# EAGLE board ethernet-expansion (EAGLE 7.2.0)
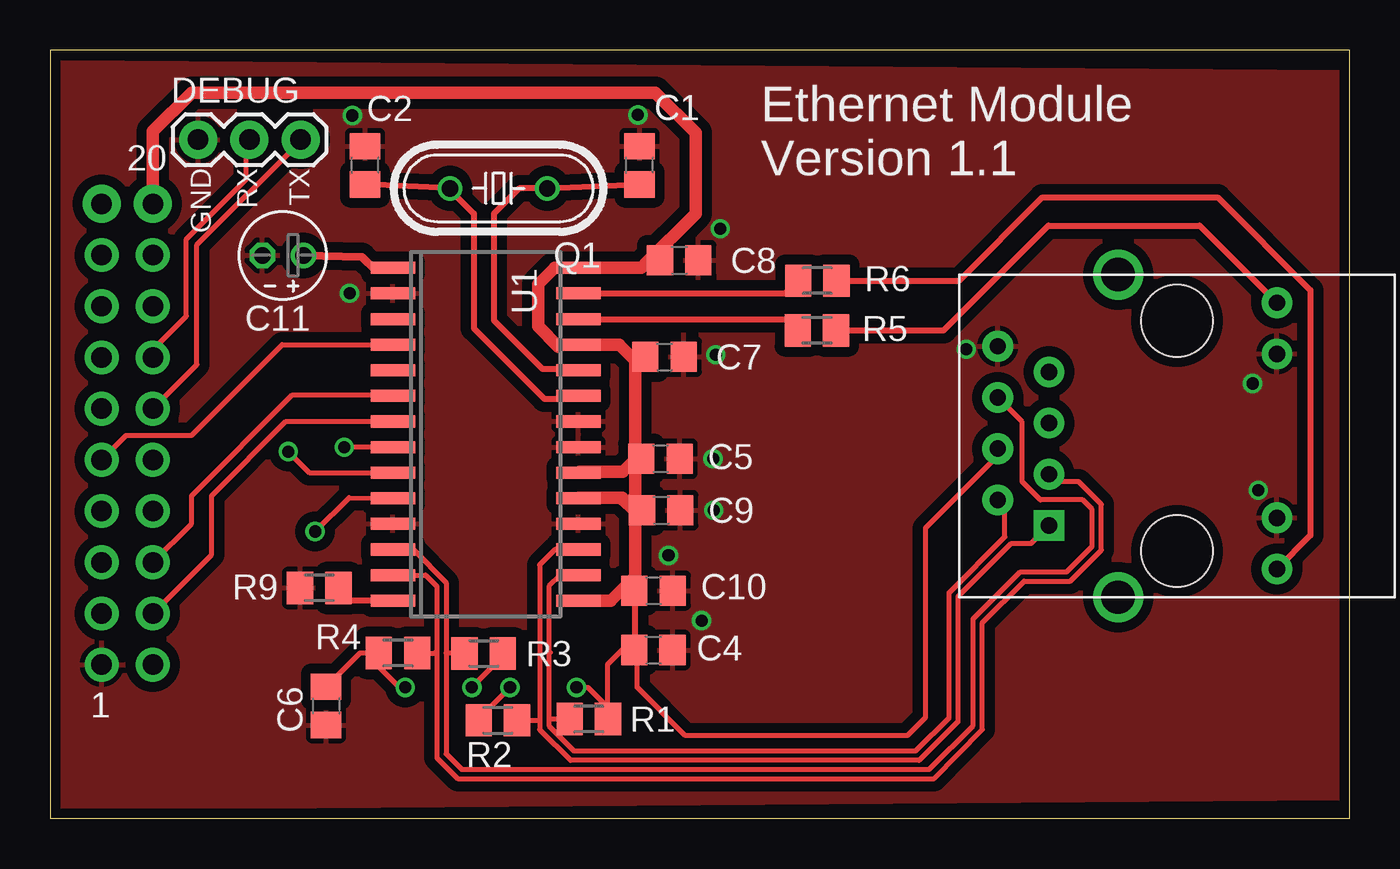
[diagram p0: board, top side]
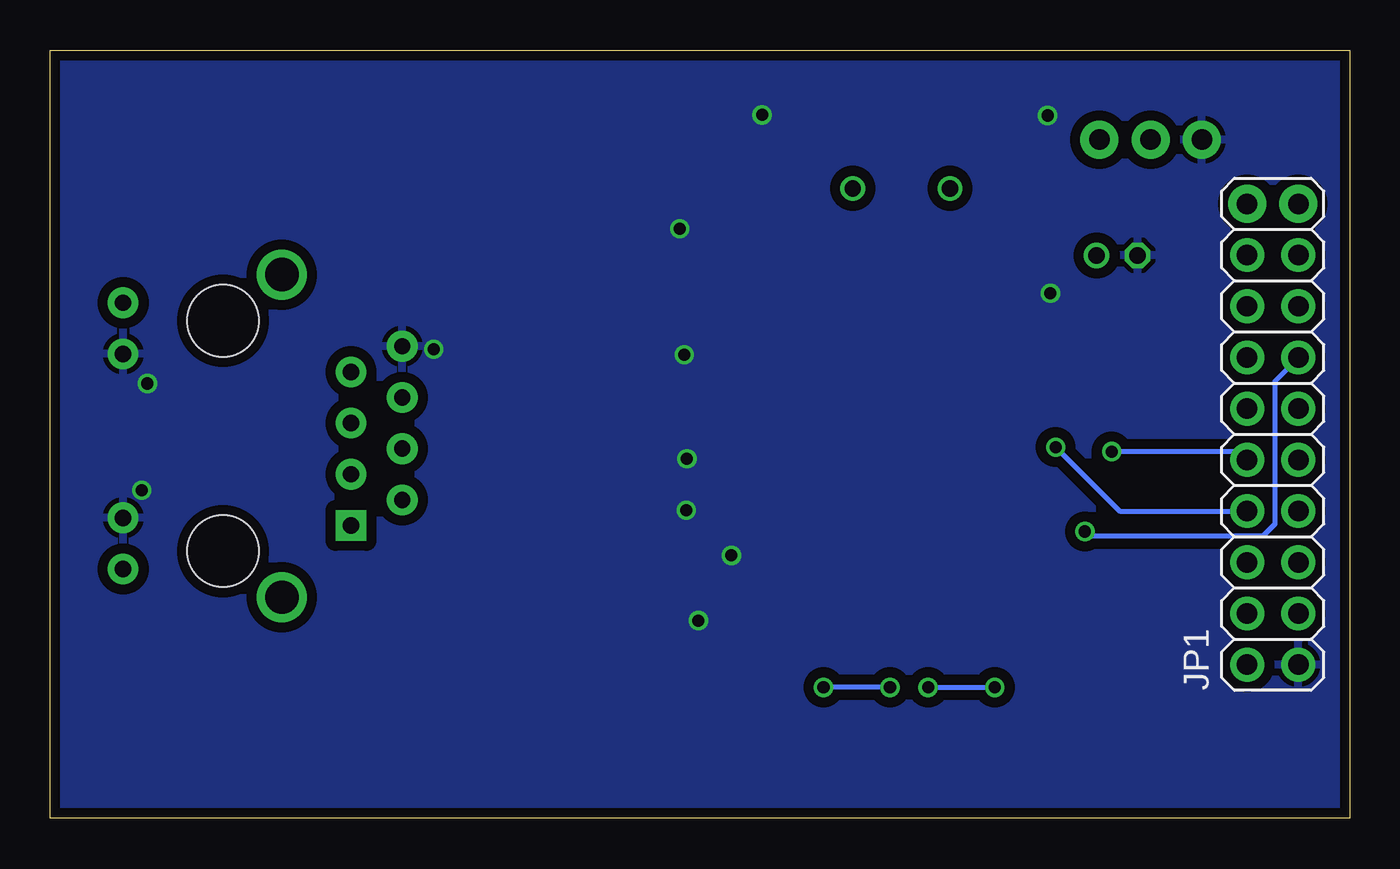
[diagram p1: board, bottom side, seen from below]

Size 64.44 x 38.09 mm. Coordinates in mm from the lower left corner, seen from the top.
Outline: 0,0 64.44,0 64.44,38.09 0,38.09 0,0
Copper layers (1*16): Top 0.0356mm / dielectric 1.5011mm / Bottom 0.0356mm
Design rules "LaenPCBOrder": minimum track width 6mil, minimum drill 13mil, track to track 6mil, track to pad 6mil, pad to pad 6mil, via to via 6mil, smd to smd 6mil, copper to edge 15mil, drill to drill 6mil, minimum pad ring 7mil, minimum via ring 7mil, stop-mask expansion 3mil, vias tented up to drill 0mil, thermal gap 10mil

## Footprints (pad centres in the part's own frame; a part is rotated, then mirrored left to right if it is on the bottom)
C0805 = smd 1.3 x 1.5: 1 -0.95,0; 2 0.95,0
E2-4 = drill 0.813 pad 1.27: + -1.016,0 | drill 0.813 pad 1.27 octagon: - 1.016,0
1X03 = drill 1.016 pad 1.88: 1 0,0; 2 2.54,0; 3 5.08,0
2X10 = drill 1.016 pad 1.676: 1 -11.43,-1.27; 2 -11.43,1.27; 3 -8.89,-1.27; 4 -8.89,1.27; 5 -6.35,-1.27; 6 -6.35,1.27; 7 -3.81,-1.27; 8 -3.81,1.27; 9 -1.27,-1.27; 10 -1.27,1.27; 11 1.27,-1.27; 12 1.27,1.27; 13 3.81,-1.27; 14 3.81,1.27; 15 6.35,-1.27; 16 6.35,1.27; 17 8.89,-1.27; 18 8.89,1.27 | drill 1.016 pad 1.88: 19 11.43,-1.27; 20 11.43,1.27
HC49/S = drill 0.813: 1 -2.413,0; 2 2.413,0
M0805 = smd 1.3 x 1.6: 1 -0.95,0; 2 0.95,0
HR911105A = drill 0.813 pad 1.524: G+ 4.953,-6.604; G- 4.953,-4.064; GND -8.89,4.445; NC -6.35,3.175; P4 -8.89,-0.635; P5 -6.35,0.635; RD+ -6.35,-1.905; RD- -8.89,1.905; TD- -8.89,-3.175; Y+ 4.953,6.604; Y- 4.953,4.064 | drill 1.651 pad 2.159: SHIELD0 -2.921,8.001; SHIELD1 -2.921,-8.001 | drill 0.813 pad 1.524 square: TD+ -6.35,-4.445 | hole 3.556: 0,-5.715; 0,5.715
SO28W = smd 0.6 x 2.2: 1 -8.255,-4.6; 2 -6.985,-4.6; 3 -5.715,-4.6; 4 -4.445,-4.6; 5 -3.175,-4.6; 6 -1.905,-4.6; 7 -0.635,-4.6; 8 0.635,-4.6; 9 1.905,-4.6; 10 3.175,-4.6; 11 4.445,-4.6; 12 5.715,-4.6; 13 6.985,-4.6; 14 8.255,-4.6; 15 8.255,4.6; 16 6.985,4.6; 17 5.715,4.6; 18 4.445,4.6; 19 3.175,4.6; 20 1.905,4.6; 21 0.635,4.6; 22 -0.635,4.6; 23 -1.905,4.6; 24 -3.175,4.6; 25 -4.445,4.6; 26 -5.715,4.6; 27 -6.985,4.6; 28 -8.255,4.6

## Placement (x,y rotation side)
C1  10pF  [C0805]  29.22,32.39 90 top
C2  10pF  [C0805]  15.61,32.39 90 top
C4  0.1uF  [C0805]  29.91,8.35 0 top
C5  0.1uF  [C0805]  30.26,17.84 0 top
C6  0.1uF  [C0805]  13.68,5.58 270 top
C7  0.1uF  [C0805]  30.46,22.89 0 top
C8  0.1uF  [C0805]  31.18,27.68 0 top
C9  0.1uF  [C0805]  30.29,15.28 0 top
C10  0.1uF  [C0805]  29.91,11.29 0 top
C11  10uF  [E2-4]  11.53,27.92 180 top
DEBUG  [1X03]  7.33,33.66 0 top
JP1  [2X10]  3.81,19.05 90 bottom
Q1  25MHz  [HC49/S]  22.23,31.25 180 top
R1  49.9  [M0805]  26.7,4.92 0 top
R2  49.9  [M0805]  22.2,4.87 180 top
R3  49.9  [M0805]  21.49,8.18 180 top
R4  49.9  [M0805]  17.24,8.2 0 top
R5  330  [M0805]  38.02,24.2 0 top
R6  330  [M0805]  38.04,26.67 0 top
R9  2.32K  [M0805]  13.34,11.43 0 top
RJ1  HR911105A  [HR911105A]  55.88,18.97 0 top
U1  ENC28J60-SO  [SO28W]  21.59,19.05 270 top

## Library data of the parts
C1 C2 C4-C11 R1-R6 R9 = resistor
DEBUG JP1 = SparkFun-Connectors
Q1 = crystal; OC_FARNELL: 1667008; OC_NEWARK: unknown
RJ1 = CONNECTER
U1 = microchip-enc28j60

## Nets
+3V3: C4.1 C5.1 C7.1 C8.1 C9.1 C10.1 JP1.20 R1.2 R2.2 RJ1.P4 U1.15 U1.19 U1.20 U1.25 U1.28
ETH_CLK: JP1.8 U1.8
ETH_CS: JP1.10 U1.9
ETH_INT: JP1.9 U1.4
ETH_MISO: JP1.6 U1.6
ETH_MOSI: JP1.4 U1.7
ETH_RESET: JP1.13 U1.10
GND: C1.2 C2.2 C4.2 C5.2 C6.2 C7.2 C8.2 C9.2 C10.2 C11.- DEBUG.1 JP1.1 R9.1 RJ1.G- RJ1.GND RJ1.Y- U1.2 U1.11 U1.18 U1.21 U1.22
GREEN: R6.1 U1.27
N$8: C6.1 R3.1 R4.1
N$9: R5.2 RJ1.Y+
N$10: R6.2 RJ1.G+
N$11: C1.1 Q1.1 U1.24
N$12: C2.1 Q1.2 U1.23
N$13: R9.2 U1.14
N$14: C11.+ U1.1
RX: DEBUG.2 JP1.14
TPIN_N: R3.2 RJ1.RD- U1.12
TPIN_P: R4.2 RJ1.RD+ U1.13
TPOUT_N: R1.1 RJ1.TD- U1.16
TPOUT_P: R2.1 RJ1.TD+ U1.17
TX: DEBUG.3 JP1.12
YELLOW: R5.1 U1.26

## Tracks (layer width: path | path; a pad name or v marks a point on that pad's centre or on a via)
+3V3  (via drill 0.61 pad 0.81)
  Top 0.254: R1.2 27.66,5.5 | 27.66,5.5 27.66,7.66 28.96,8.96 | R2.2 21.25,4.95 v22.8,6.5 | v26.1,6.5 26.66,6.5 27.66,5.5 | 28.96,8.96 C4.1 29.1,8.21 29.1,6.5 31.5,4.1 42.5,4.1 43.4,5 43.4,14.4 46.99,17.99 RJ1.P4 | 28.96,8.96 29,9
  Top 0.305: 29,9 29,11.26 C10.1 | C9.1 29.24,15.24 29,15 | C5.1 29.16,17.84 29,18 | C8.1 29.68,27.68 29.5,27.5
  Top 0.406: U1.28 25,27.3 | 25.2,23.4 26.09,23.4 U1.25
  Top 0.61: U1.25 28.2,23.5 29,22.7 | 29,22.7 29,18 29,17.8 | 25,27.3 24.2,26.5 24.2,24.4 25.2,23.4 | 29,17.8 28.4,17.2 26.25,17.2 U1.20 | U1.15 27.8,10.79 28.96,11.96 | 28.6,15.6 29,15.2 29,15 29,12 28.96,11.96 | 28.6,15.6 28.3,15.9 | 28.3,15.9 26.21,15.9 U1.19 | 28.3,15.9 28.36,15.9 | 29,22.7 29,23 29.4,23 C7.1 | C10.1 28.96,11.96 | U1.28 29.3,27.3 29.5,27.5 32,30 32,34 30,36 7,36 5.08,34.08 JP1.20 | 29,17.8 29,16 28.6,15.6
  Bottom 0.254: v22.8,6.5 v26.1,6.5
ETH_CLK  (via drill 0.6)
  Top 0.254: U1.8 v14.58,18.41
  Bottom 0.254: JP1.8 11.41,15.24 v14.58,18.41
ETH_CS  (via drill 0.6)
  Top 0.254: v11.8,18.19 12.85,17.14 U1.9
  Bottom 0.254: JP1.10 5.49,18.19 v11.8,18.19
ETH_INT
  Top 0.254: JP1.9 3.76,19 7,19 11.49,23.5 U1.4
ETH_MISO
  Top 0.254: U1.6 16.95,21 12,21 7,16 7,14.62 JP1.6
ETH_MOSI
  Top 0.254: JP1.4 8,13.08 8,16 11.69,19.68 U1.7
ETH_RESET  (via drill 0.6)
  Top 0.254: v13.13,14.23 14.81,15.9 U1.10
  Bottom 0.254: JP1.13 3.71,21.69 3.71,14.59 4.3,14 12.9,14 v13.13,14.23
GND  (via drill 0.6)
  other vias: 14.84,26.04 14.98,34.86 29.14,34.89 33.22,29.24 33,23 32.87,17.84 32.9,15.28 30.66,13.04 32.3,9.81 45.43,23.27 59.63,21.57 59.91,16.27
  pour Top (isolate 0.5): 0.5,37.5 64,37 64,1 0.5,0.5
  pour Bottom (isolate 0.5): 0,0 0,38 64,38 64,0
GREEN
  Top 0.305: U1.27 36.45,26.04 R6.1
N$8  (via drill 0.61 pad 0.81)
  Top 0.254: C6.1 15.35,8.2 R4.1 16.1,8.01 16.1,7.7 17.3,6.5 v17.6,6.5 | R3.1 22.34,7.94 v20.9,6.5
  Bottom 0.254: v20.9,6.5 v17.6,6.5
N$9
  Top 0.305: R5.2 44.3,24.2 49.5,29.4 57.01,29.4 RJ1.Y+
N$10
  Top 0.305: R6.2 45.07,26.67 49.2,30.8 57.9,30.8 62.5,26.2 62.5,14.03 RJ1.G+
N$11
  Top 0.305: C1.1 Q1.1 23.25,31.25 22,30 22,24.7 24.4,22.3 26.11,22.3 U1.24
N$12
  Top 0.305: C2.1 Q1.2 19.82,31.18 21,30 21,24.3 24.5,20.8 26.04,20.8 U1.23
N$13
  Top 0.305: U1.14 14.92,10.79 R9.2
N$14
  Top 0.406: C11.+ 15.45,27.85 16.1,27.2 16.89,27.2 U1.1
RX
  Top 0.254: JP1.14 5.08,23.24 6.75,24.91 6.75,28.73 9.72,31.7 9.72,33.51 DEBUG.2
TPIN_N
  Top 0.254: U1.12 17.99,13.34 19.63,11.7 19.63,8.2 | 19.63,8.2 19.63,3.19 20.39,2.43 43.59,2.43 45.77,4.59 45.77,9.89 48.1,12.23 50.41,12.23 51.67,13.49 51.67,15.33 51.2,15.8 49.1,15.8 48.2,16.7 48.2,19.66 RJ1.RD- | R3.2 20.44,8.19 19.64,8.19 19.63,8.2
TPIN_P
  Top 0.254: U1.13 18.61,12.06 19.17,11.51 19.17,8.3 | 19.17,8.3 19.17,3 20.2,1.97 43.84,1.97 46.23,4.41 46.23,9.71 48.3,11.77 50.59,11.77 52.13,13.3 52.13,15.57 51,16.7 49.9,16.7 RJ1.RD+ | R4.2 19.07,8.2 19.17,8.3
TPOUT_N
  Top 0.254: U1.16 25.29,12.06 24.73,11.51 24.73,8.3 | 24.73,8.3 24.73,5 | 24.73,5 24.73,4.59 26,3.33 42.91,3.33 44.57,5 44.57,11.2 47.34,13.96 47.34,15.45 RJ1.TD- | 24.8,8.22 24.73,8.3 | R1.1 24.8,4.92 24.73,5
TPOUT_P
  Top 0.254: U1.17 25.04,13.34 24.27,12.57 24.27,4.8 | 24.27,4.8 24.27,4.41 25.8,2.87 43.09,2.87 45.03,4.8 45.03,11.01 47.66,13.64 48.64,13.64 RJ1.TD+ | R2.1 24.21,4.87 24.27,4.8
TX
  Top 0.254: JP1.12 7.27,22.51 7.27,28.44 12.41,33.58 DEBUG.3
YELLOW
  Top 0.305: U1.26 36.51,24.77 R5.1

## Text on the board
tPlace: 20 | Ethernet Module / Version 1.1 | RX | TX | GND | 1